# Altium PCB Cubit2_0.PcbDoc (part 3 of 4)
Units mm, origin at the board's own origin, x right, y up, seen from the top; angles counter-clockwise.
Board outline 116.28 x 70 mm, 4 copper layers (Top Layer, Layer 2, Layer 3, Bottom Layer), stack 0.602 mm thick; 141 components, 99 nets, 462 pads, 294 vias.
Unrouted connection lines stored in the file: 2.
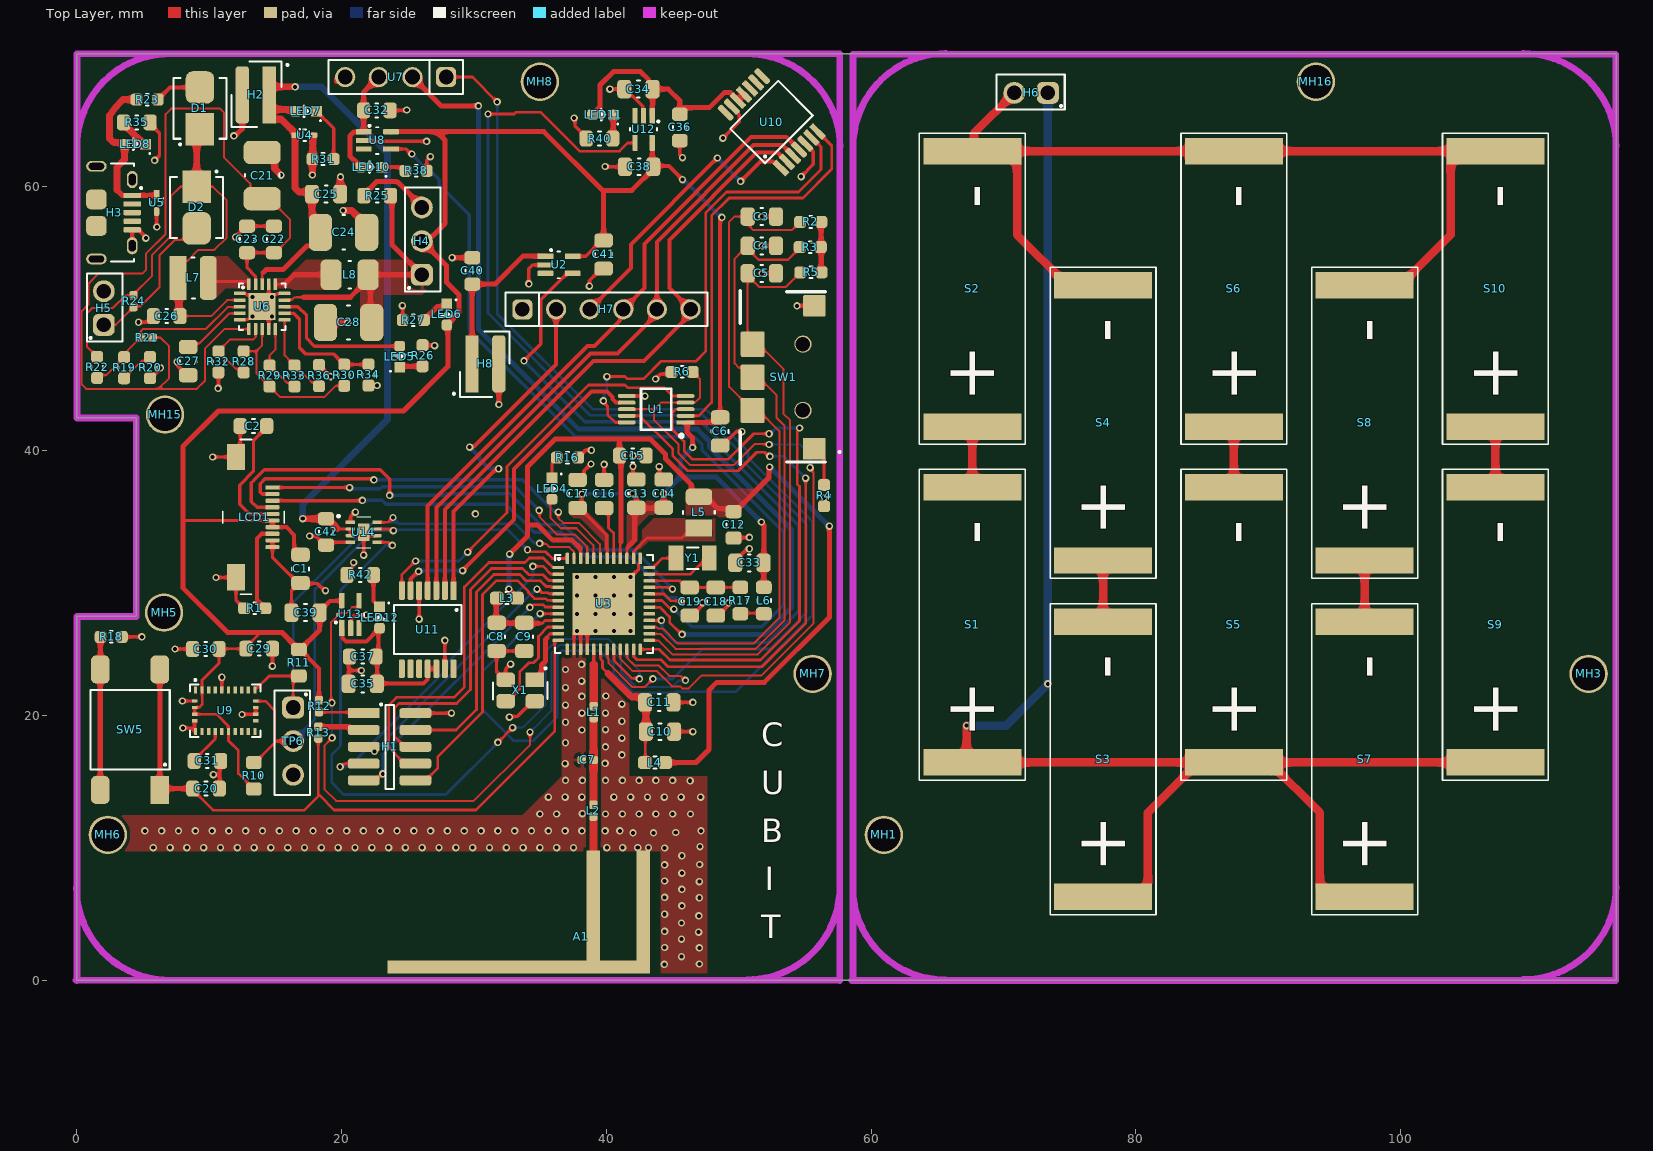
[diagram p0: Top Layer view]

## Part data (continued)
U10 U11: Manufacturer=Osram, Category=Uncategorized, Manufacturer Part Number=AS5047D-ATSM, Pricing 1="1=9.40000, 5=8.25000, 10=7.42500, 25=6.60000, 50=6.10500, 100=5.28000 (USD)", RoHS=No, Stock 1=16475, Supplier 1=Digi-Key
U14: library part MAX17048G+T10, "Battery Battery Monitor IC Lithium-Ion 8-TDFN-EP (", Manufacturer=Maxim, Max Operating Temperature=85°C, Min Operating Temperature=-40°C, Operating Supply Current=23uA, Operating Supply Voltage=4.5V, Output Voltage=400mV, Package Quantity=10000, Category="Battery Management", ComponentLink1Description=https://datasheet.ciiva.com/14083/max17048-max17049-14083973.pdf?src-supplier=Digikey, ComponentLink1URL=https://datasheet.ciiva.com/14083/max17048-max17049-14083973.pdf?src-supplier=Digikey, Manufacturer Part Number=MAX17048G+T10, Mount="Surface Mount", Number of Pins=8, Packaging="Tape and Reel", Pricing 1="1=3.38, 10=3.034, 25=2.868, 100=2.4855, 250=2.35804, 500=2.11586, 1000=1.78445, 2500=1.69523, 5000=1.6315 (USD)", Radiation Hardening=No, RoHS=Yes, RoHS Compliant=Yes, Series=ModelGauge™, Stock 1=29108, Supplier 1=Digikey
X1: library part RH100-38.400-10-F-1010-TR, "Crystal 38.4000MHZ 10PF SMD", Manufacturer="Raltron Electronics", Manufacturer Part Number=RH100-38.400-10-F-1010-TR, Pricing 1="1=0.39000, 10=0.32400, 50=0.29180, 100=0.25940, 500=0.24640, 1000=0.20750 (USD)", RoHS=Yes, Stock 1=6000, Supplier 1=Digi-Key
Y1: "32.768kHz Â±20ppm Crystal 7pF 70 kOhms 2-SMD, No Lead", Package="SMD-2 ECS International", Availability=Unavailable, MF="ECS Inc.", MP=ECS-.327-7-34B-TR, Price=None, SnapEDA_Link=https://www.snapeda.com/parts/ECS-.327-7-34B-TR/ECS%20Inc./view-part/55054/?ref=snap

## Via types
v1: diameter 0.559, hole 0.305, Top Layer to Bottom Layer, tented both sides, 291 vias
v2: diameter 0.61, hole 0.305, Top Layer to Bottom Layer, tented both sides, 2 vias
v3: diameter 0.559, hole 0.305, Top Layer to Bottom Layer, 1 vias

## Nets (pads, with @x,y where several pads share a name; then routed paths per layer and width w, separated by ;. In a path a pad name is that pad's centre, name@x,y a point inside that pad or via, vN(x,y) a via of type N, cw(c..) or ccw(c..) an arc to the next point about the centre after c; other vN are vias at no path point)
2G4RF_IOP: L1.1 U3.17 | length 4.5
  Top Layer w0.254: 38.901,23.721 39.049,23.869 39.049,24.71 39.052,24.713 U3.17@39.052,25.013
  Top Layer w0.62: L1.1@39.043,20.709 39.043,23.863
+1V8_DCDC: C12.1 C15.1 L3.1 L4.1 L5.2 U3.40 U3.46 | length 82
  Top Layer w0.203: U3.46@38.037,31.897 38.037,32.634 ; U3.40@41.052,31.883 41.052,33.07 41.098,33.116
  Top Layer w0.381: v1(32.634,29.572) 32.668,29.538 32.668,29.463 33.247,28.884 L3.1@33.247,28.88 ; v1(32.69,32.213) 34.054,33.578 34.054,34.442 ; 38.037,32.634 37.413,33.259 35.956,33.259 34.805,34.41 34.086,34.41 34.054,34.442 ; 41.098,33.116 41.098,39.538 C15.1@40.986,39.649 40.986,40.853 40.945,40.894 ; L4.1@44.428,16.459 46.761,16.459 47.752,17.45 47.752,21.933 48.34,22.521 51.934,22.521 56.845,27.432 v1(56.845,34.315) ; L5.2@46.99,36.532 46.848,36.532 46.422,36.957 46.422,37.452 44.468,39.407 44.468,39.75 43.324,40.894 40.945,40.894 ; L5.2@46.99,36.71 47.365,36.71 48.435,35.64 49.383,35.64 C12.1@49.606,35.417 49.706,35.417 52.291,38.001 52.291,38.752 v1(52.325,38.786) ; 34.054,34.442 34.054,38.829 36.119,40.894 40.945,40.894
  Bottom Layer w0.381: v1(32.634,29.572) 32.634,32.05 32.656,32.072 32.656,32.179 v1(32.69,32.213) ; v1(52.325,38.786) 52.349,38.786 56.82,34.315 v1(56.845,34.315)